# Altium PCB prop_MMX.PCBDOC
Units mm, origin at the board's own origin, x right, y up, seen from the top; angles counter-clockwise.
Board outline 153.2 x 80.2 mm, 2 copper layers (Top Layer, Bottom Layer); 69 components, 78 nets, 392 pads, 251 vias.
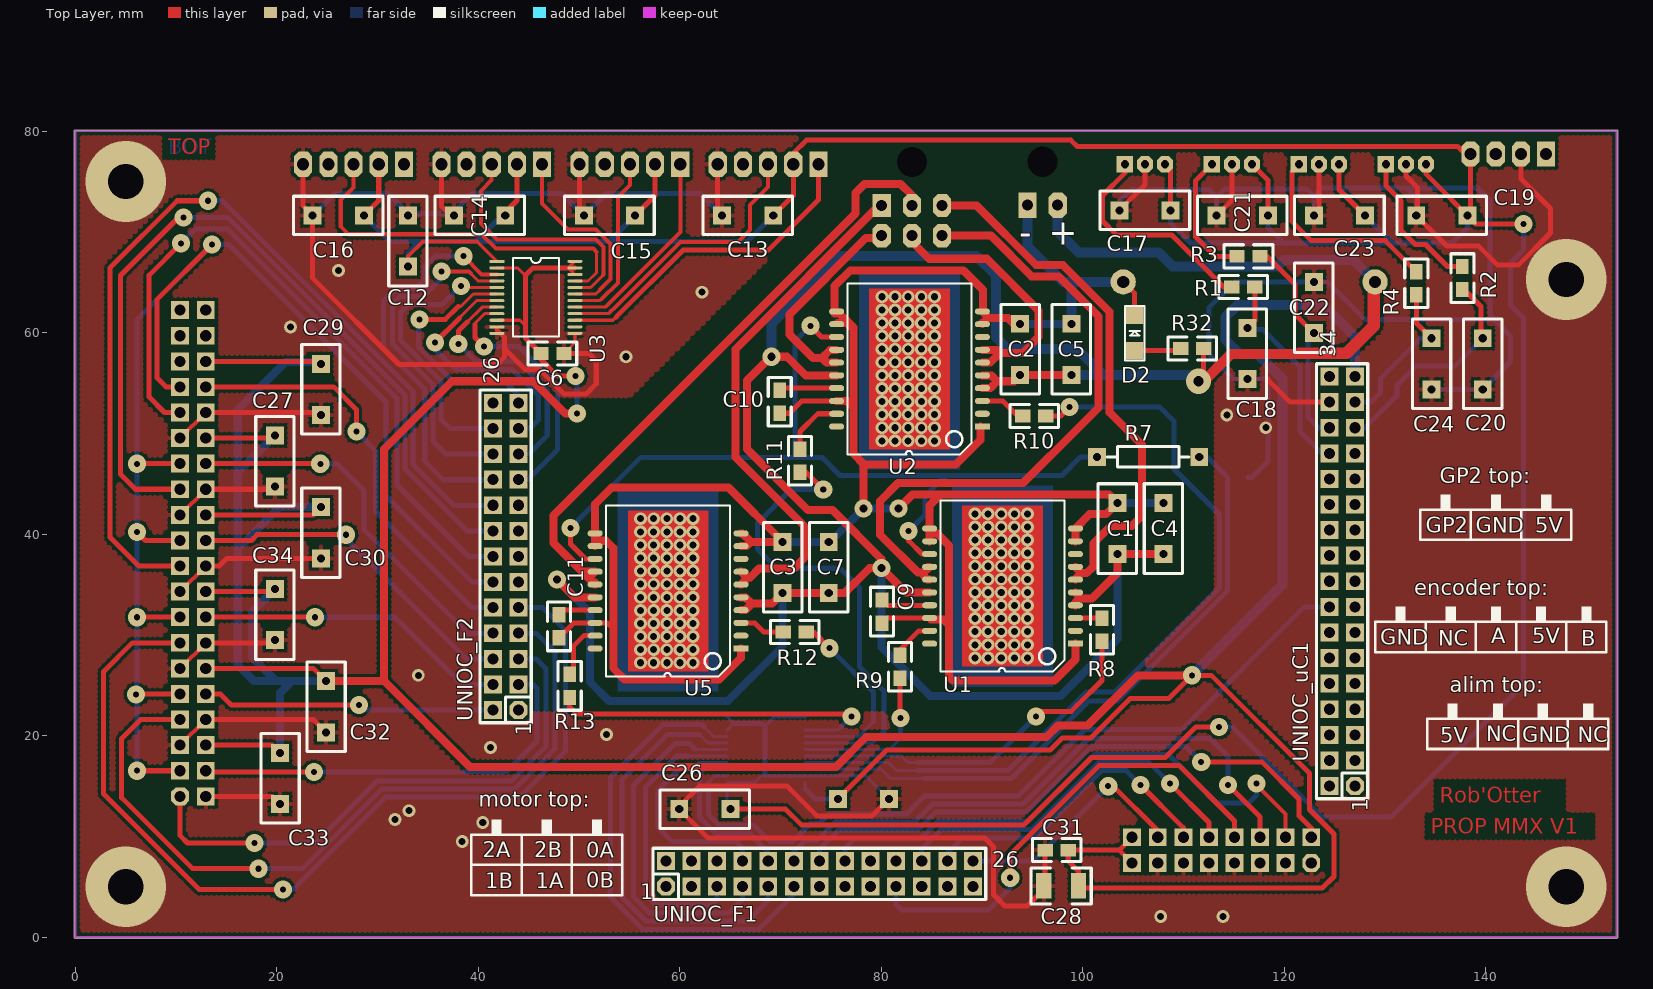
[diagram p0: Top Layer view]
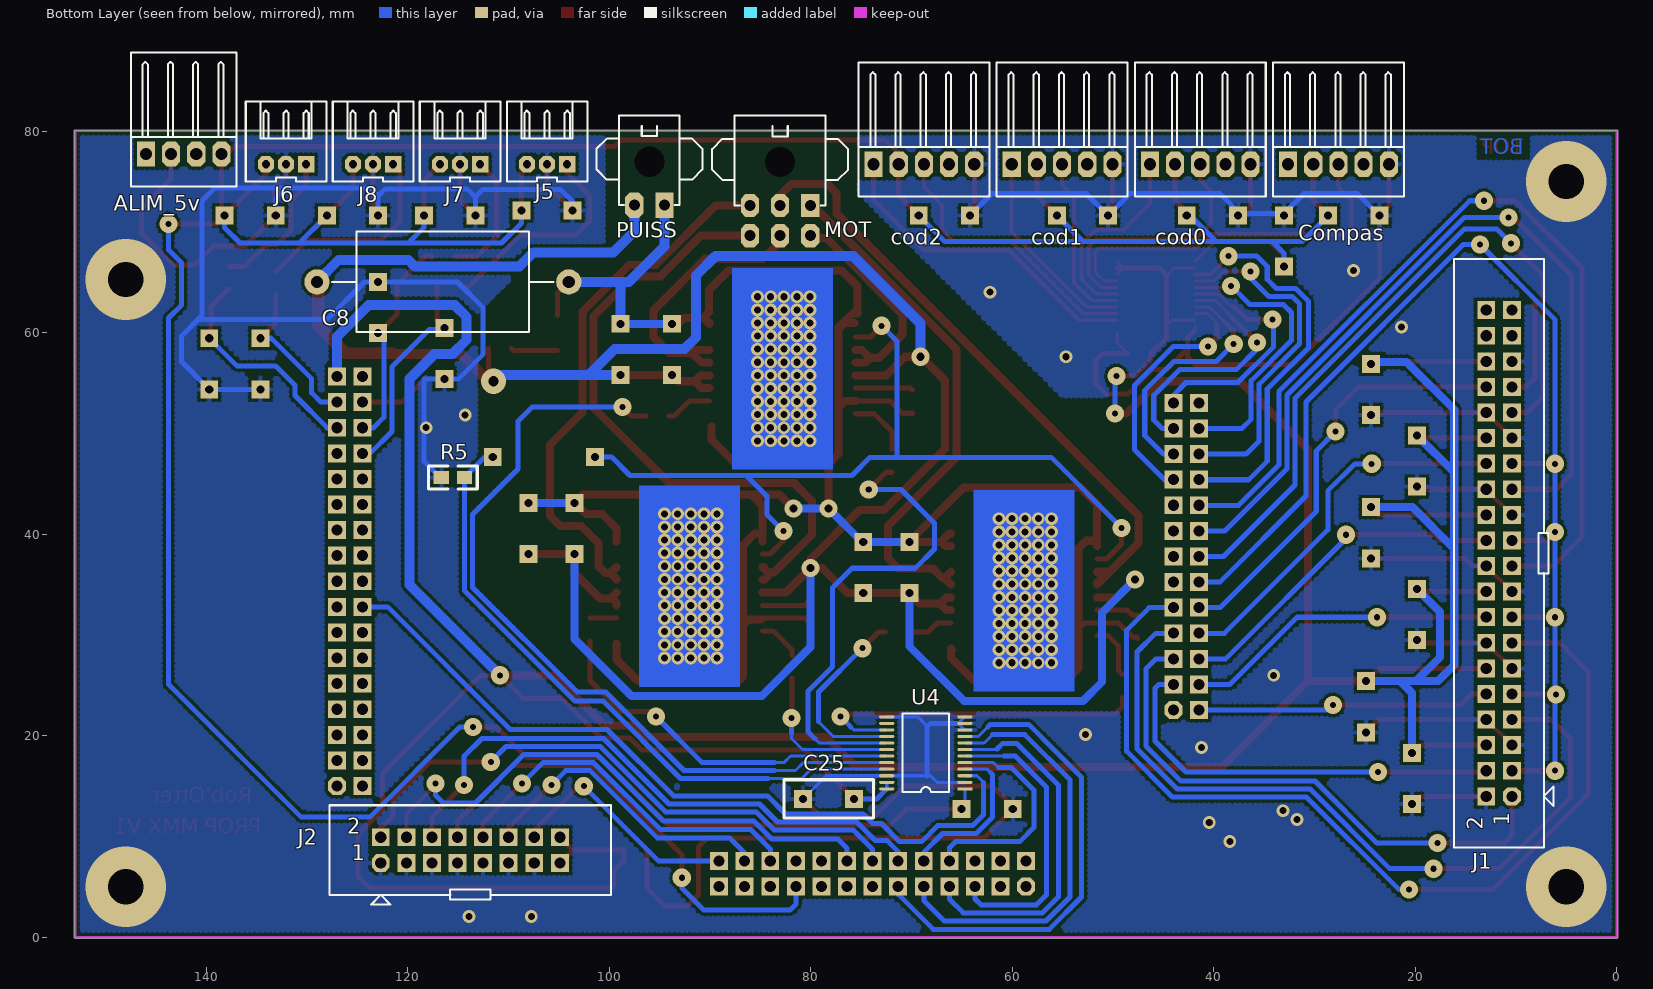
[diagram p1: Bottom Layer view, seen from below]

## Layer stack, top to bottom
Top Layer: signal copper 0.0356
Dielectric: dielectric 0.32, FR-4, Dk 4.8
Bottom Layer: signal copper 0.0356

## Board outline
0,-0.1 cw(c0,0) -0.1,0 -0.1,80 cw(c0,80) 0,80.1 153,80.1 cw(c153,80) 153.1,80 153.1,0 cw(c153,0) 153,-0.1

## Design rules (kind name [scope] priority, off if disabled: settings)
Clearance [All] p1 off: gap=0.4
Clearance plan_de_masse [(IsPolygon)] p2 off: gap=0.8
Clearance max3002 [All] p3: gap=0.3
ComponentClearance [All] p1: gap=0.254 collisioncheckmode=1
HoleSize [All] p1: absolutevalues=TRUE maxlimit=4 minlimit=0.025 maxpercent=80.000 minpercent=20.000
PlaneClearance [All] p1: clearance=0.8
PlaneConnect [All] p1: planeconnectstyle=Direct reliefexpansion=0.508 reliefentries=4 reliefconductorwidth=0.4 reliefairgap=0.254
PolygonConnect [All] p1: connectstyle=Relief reliefconductorwidth=0.4 reliefentries=4 polygonreliefangle="90 Angle"
RoutingLayers [All] p1: top layer=Horizontal bottom layer=Vertical
RoutingVias [All] p1: holewidth=0.6 width=1.8 viastyle="Through Hole" minholewidth=0.6 minwidth=1.6 maxholewidth=0.6 maxwidth=4
SolderMaskExpansion [All] p1: expansion=0.102
TestPointUsage [All] p1: valid=0 allowmultiple=FALSE
Testpoint [All] p1: side=15 testpointundercomponent=TRUE minsize=1.016 maxsize=2.54 preferedsize=1.524 minholesize=0 maxholesize=1.016 preferedholesize=0.813 testpointgrid=0.025 style=1023 order=1234567890
Width [All] p1: maxlimit=2 minlimit=0.3 preferedwidth=0.5 bottomlayer_prefwidth=1 minimp=50.000000 maximp=50.000000 favimp=50.000000
13 further rules are at their usual default settings.

## Classes and differential pairs
component class U_ground_detector: C27 C29 C30 C32 C33 C34 J1
component class U_pontH: C1 C2 C3 C4 C5 C7 C8 C9 C10 C11 C25 C26 D2 fan MOT PUISS R5 R7 R8 R9 R10 R11 R12 R13 R32 U1 U2 U4 U5
component class compas_heds_mouse: ALIM_5v C6 C12 C13 C14 C15 C16 C17 C18 C19 C20 C21 C22 C23 C24 C28 C31 cod0 cod1 cod2 Compas J2 J5 J6 J7 J8 R1 R2 R3 R4 U3 UNIOC_F1 UNIOC_F2 UNIOC_uC1

## Components (designator, comment, footprint, x,y, rotation, side; value= is the part's Value field where it differs from the comment)
ALIM_5v "minikk_4v_hor" CON_MINI_KK_4H 142.24,77.724 r180 bottom
C1 "100nF" TCONDO 103.441,38.016 r90 top
C2 "100nF" TCONDO 93.789,55.796 r90 top
C3 "100nF" TCONDO 74.79,34.156 r90 top
C4 "1µF" TCONDO 108.013,38.016 r90 top
C5 "1µF" TCONDO 98.869,55.796 r90 top
C6 "100nF" 0805 46.228,57.912 r0 top
C7 "1µF" TCONDO 70.218,34.156 r90 top
C8 "1500µF" CAPA_AXIAL_10_21 129.032,65.024 r180 bottom
C9 "33nF" 0805 80.073,33.444 r270 top
C10 "33nF" 0805 69.913,54.272 r270 top
C11 "33nF" 0805 48.004,31.971 r270 top
C12 "100nF" TCONDO 33.02,66.548 r90 top
C13 "100nF" TCONDO 69.276,71.628 r180 top
C14 "100nF" TCONDO 42.672,71.628 r180 top
C15 "100nF" TCONDO 55.56,71.628 r180 top
C16 "100nF" TCONDO 28.636,71.628 r180 top
C17 "100nF" TCONDO 108.712,72.136 r180 top
C18 "100nF" TCONDO 116.332,60.452 r270 top
C19 "100nF" TCONDO 138.176,71.628 r180 top
C20 "100nF" TCONDO 139.7,59.436 r270 top
C21 "100nF" TCONDO 118.364,71.628 r180 top
C22 "100nF" TCONDO 122.936,59.944 r90 top
C23 "100nF" TCONDO 128.016,71.628 r180 top
C24 "100nF" TCONDO 134.62,59.436 r270 top
C25 "100nF" TCONDO 75.692,13.716 r0 bottom
C26 "100nF" TCONDO 65.024,12.7 r180 top
C27 "100nF" TCONDO 19.812,49.784 r270 top
C28 "2,2µF" 1210 99.568,5.08 r180 top
C29 "100nF" TCONDO 24.384,56.896 r270 top
C30 "100nF" TCONDO 24.384,42.672 r270 top
C31 "100nF" 0805 98.552,8.636 r180 top
C32 "100nF" TCONDO 24.892,25.4 r270 top
C33 "100nF" TCONDO 20.32,18.288 r270 top
C34 "100nF" TCONDO 19.812,34.544 r270 top
cod0 "minikk_5v_hor" CON_MINI_KK_5H 41.336,76.708 r180 bottom
cod1 "minikk_5v_hor" CON_MINI_KK_5H 55.052,76.708 r180 bottom
cod2 "minikk_5v_hor" CON_MINI_KK_5H 68.768,76.708 r180 bottom
Compas "minikk_5v_hor" CON_MINI_KK_5H 27.62,76.708 r180 bottom
D2 "POWER" LED_CMS 105.156,59.944 r270 top
J1 "40PIN" HE10-40V 11.684,38.1 r90 bottom
J2 "16PIN" HE10-16V 113.792,8.636 r180 bottom
J5 "JST_3V_GP2D" CON_GP2_V 106.172,76.708 r180 bottom
J6 "JST_3V_GP2D" CON_GP2_V 132.08,76.708 r180 bottom
J7 "JST_3V_GP2D" CON_GP2_V 114.808,76.708 r180 bottom
J8 "JST_3V_GP2D" CON_GP2_V 123.444,76.708 r180 bottom
MOT "6PIN" CON_MAT_N_LOK_2*3H 83.044,71.12 r0 bottom
PUISS "mnlok_2h" CON_MAT_N_LOK_2H 96.012,72.644 r0 bottom
R1 "10k" 0805 114.808,64.516 r0 top
R2 "10k" 0805 137.668,66.548 r270 top
R3 "10k" 0805 115.316,67.564 r0 top
R4 "10k" 0805 133.096,66.04 r270 top
R5 "10k" 0805 114.379,45.636 r0 bottom
R7 "470" TRES 101.409,47.668 r0 top
R8 "470" 0805 101.917,29.38 r90 top
R9 "470" 0805 81.877,25.697 r90 top
R10 "470" 0805 96.329,51.732 r180 top
R11 "470" 0805 71.945,46.144 r90 top
R12 "470" 0805 72.555,30.295 r180 top
R13 "470" 0805 49.085,23.792 r90 top
R32 "1k" 0805 109.728,58.42 r0 top
U1 "MC33886" HSOP20 92.037,34.841 r180 top
U2 "MC33886" HSOP20 82.804,56.388 r180 top
U3 "74lvc4245a" SSOP24 45.72,63.5 r0 top
U4 "74lvc4245a" SSOP24 68.58,18.288 r0 bottom
U5 "MC33886" HSOP20 58.839,34.359 r180 top
UNIOC_F1 "UNIOC_NG_FPGA2" TCON26 58.62,5 r0 top locked
UNIOC_F2 "UNIOC_NG_FPGA1" TCON26 44,22.54 r90 top
UNIOC_uC1 "UNIOC_NG_µC" TCON34 127,15 r90 top locked

## Footprints (in the part's own frame and the unit in brackets; to place one, negate y for a bottom-side part, rotate by r counter-clockwise, add the part's x,y. Pads: shape width x height; smd on the part's side, far side on the other; paste and mask are expansions set on the pad)
0805 [mil]
  rect 60x50 smd: 1(-0.32,0.36) 2(89.68,0.36)
  silkscreen extent -50,-45 140,45
1210 [mil]
  rect 60x100 smd: 1(-0.2,0.1) 2(134.8,0.1)
  silkscreen extent -50,-70 185,70
CAPA_AXIAL_10_21 [mm]
  round 2.5 hole 1.2: 1(0.015,0.012) 2(25.015,0.012)
  silkscreen extent 1.52,-4.99 23.52,5.01
CON_GP2_V [mm]
  rect 1.6x1.6 hole 0.8: 1(2,0)
  oct 1.6x1.6 hole 0.8: 2(0,0) 3(-2,0)
  silkscreen extent -4,-1.7 4,6.25
CON_MAT_N_LOK_2*3H [mm]
  rect 1.8x2.3 hole 1.1: 1(-3,-1.5)
  oct 1.8x2.3 hole 1.1: 2(-3,1.5) 3(0,-1.5) 4(0,1.5) 5(3,-1.5) 6(3,1.5)
  round 1.524 hole 3: ""(0,-5.82)
  silkscreen extent -6.75,-10.42 6.75,-1.5
CON_MAT_N_LOK_2H [mm]
  rect 1.8x2.5 hole 1.1: 1(-1.5,0)
  oct 1.8x2.5 hole 1.1: 2(1.5,0)
  round 1.524 hole 3: 3(0,-4.32)
  silkscreen extent -5.25,-8.92 5.25,0
CON_MINI_KK_4H [mm]
  rect 1.8x2.5 hole 1.2: 1(-3.75,0)
  oct 1.8x2.5 hole 1.2: 2(-1.25,0) 3(1.25,0) 4(3.75,0)
  silkscreen extent -5.25,-3.2 5.25,10.1
CON_MINI_KK_5H [mm]
  rect 1.8x2.5 hole 1.2: 1(-5,0)
  oct 1.8x2.5 hole 1.2: 2(-2.5,0) 3(0,0) 4(2.5,0) 5(5,0)
  silkscreen extent -6.5,-3.2 6.5,10.1
HE10-16V [mil]
  oct 70x70 hole 43.31: 1(-350,-50)
  rect 70x70 hole 43.31: 2(-350,50) 3(-250,-50) 4(-250,50) 5(-150,-50) 6(-150,50) 7(-50,-50) 8(-50,50) 9(50,-50) 10(50,50) 11(150,-50) 12(150,50) 13(250,-50) 14(250,50) 15(350,-50) 16(350,50)
  silkscreen extent -550,-213 550,175
HE10-40V [mil]
  oct 70x70 hole 43.31: 1(-950,-50)
  rect 70x70 hole 43.31: 2(-950,50) 3(-850,-50) 4(-850,50) 5(-750,-50) 6(-750,50) 7(-650,-50) 8(-650,50) 9(-550,-50) 10(-550,50) 11(-450,-50) 12(-450,50) 13(-350,-50) 14(-350,50) 15(-250,-50) 16(-250,50) 17(-150,-50) 18(-150,50) 19(-50,-50) 20(-50,50) 21(50,-50) 22(50,50) 23(150,-50) 24(150,50) 25(250,-50) 26(250,50) 27(350,-50) 28(350,50) 29(450,-50) 30(450,50) 31(550,-50) 32(550,50) 33(650,-50) 34(650,50) 35(750,-50) 36(750,50) 37(850,-50) 38(850,50) 39(950,-50) 40(950,50)
  silkscreen extent -1150,-213 1150,175
HSOP20 [mm]
  rect 1.5x0.6 smd: 1(-7.235,5.715)
  oval 1.5x0.6 smd: 2(-7.235,4.445) 3(-7.235,3.175) 4(-7.235,1.905) 5(-7.235,0.635) 6(-7.235,-0.635) 7(-7.235,-1.905) 8(-7.235,-3.175) 9(-7.235,-4.445) 10(-7.235,-5.715) 11(7.235,-5.715) 12(7.235,-4.445) 13(7.235,-3.175) 14(7.235,-1.905) 15(7.235,-0.635) 16(7.235,0.635) 17(7.235,1.905) 18(7.235,3.175) 19(7.235,4.445) 20(7.235,5.715)
  Top Layer region: -3.999,-8 4.001,-8 4.001,8 -3.999,8
  Bottom Layer region: -5,-10 5,-10 5,10 -5,10
  silkscreen extent -6.14,-8.5 6.14,8.5
LED_CMS [mm]
  rect 1.7x1.7 smd: 1(1.744,0.003) 2(-1.756,0.003)
  silkscreen extent -2.71,-0.95 2.69,0.95
SSOP24 [mm]
  rect 1.5x0.3 smd: 1(-3.875,3.575)
  oval 1.5x0.3 smd: 2(-3.875,2.925) 3(-3.875,2.275) 4(-3.875,1.625) 5(-3.875,0.975) 6(-3.875,0.325) 7(-3.875,-0.325) 8(-3.875,-0.975) 9(-3.875,-1.625) 10(-3.875,-2.275) 11(-3.875,-2.925) 12(-3.875,-3.575) 13(3.875,-3.575) 14(3.875,-2.925) 15(3.875,-2.275) 16(3.875,-1.625) 17(3.875,-0.975) 18(3.875,-0.325) 19(3.875,0.325) 20(3.875,0.975) 21(3.875,1.625) 22(3.875,2.275) 23(3.875,2.925) 24(3.875,3.575)
  silkscreen extent -2.29,-3.9 2.29,3.9
TCON26 [mil]
  oct 70x70 hole 43.31: 1(0.05,0.35)
  rect 70x70 hole 43.31: 2(0.05,100.35) 3(100.05,0.35) 4(100.05,100.35) 5(200.05,0.35) 6(200.05,100.35) 7(300.05,0.35) 8(300.05,100.35) 9(400.05,0.35) 10(400.05,100.35) 11(500.05,0.35) 12(500.05,100.35) 13(600.05,0.35) 14(600.05,100.35) 15(700.05,0.35) 16(700.05,100.35) 17(800.05,0.35) 18(800.05,100.35) 19(900.05,0.35) 20(900.05,100.35) 21(1000.05,0.35) 22(1000.05,100.35) 23(1100.05,0.35) 24(1100.05,100.35) 25(1200.05,0.35) 26(1200.05,100.35)
  silkscreen extent -50,-50 1250,150
TCON34 [mil]
  oct 70x70 hole 43.31: 1(-0.11,-0.8)
  rect 70x70 hole 43.31: 2(-0.11,99.2) 3(99.89,-0.8) 4(99.89,99.2) 5(199.89,-0.8) 6(199.89,99.2) 7(299.89,-0.8) 8(299.89,99.2) 9(399.89,-0.8) 10(399.89,99.2) 11(499.89,-0.8) 12(499.89,99.2) 13(599.89,-0.8) 14(599.89,99.2) 15(699.89,-0.8) 16(699.89,99.2) 17(799.89,-0.8) 18(799.89,99.2) 19(899.89,-0.8) 20(899.89,99.2) 21(999.89,-0.8) 22(999.89,99.2) 23(1099.89,-0.8) 24(1099.89,99.2) 25(1199.89,-0.8) 26(1199.89,99.2) 27(1299.89,-0.8) 28(1299.89,99.2) 29(1399.89,-0.8) 30(1399.89,99.2) 31(1499.89,-0.8) 32(1499.89,99.2) 33(1599.89,-0.8) 34(1599.89,99.2)
  silkscreen extent -50,-51 1650,149
TCONDO [mil]
  rect 70x70 hole 31.5: 1(-0.12,0.1) 2(199.88,0.1)
  silkscreen extent -75,-75 275,75
TRES [mil]
  rect 70x70 hole 31.5: 1(-0.19,-0.07) 2(399.81,-0.07)
  silkscreen extent 40,-40 360,40

## Part data
ALIM_5v: library part con_mini_kk_4h, "connecteur mini kk 4voies horizontal"
C1 C2 C3 C9 C10 C11 C27 C29 C30 C31 C32 C33 C34: library part TCONDO
C4 C5 C6 C7 C12 C13 C14 C15 C16 C17 C18 C19 C20 C21 C22 C23 C24 C25 C26: library part CONDO
C8 C28: library part "CAPACITOR POL"
cod0 cod1 cod2 Compas: library part con_mini_kk_5h, "connecteur mini kk 5 voies horizontal"
D2: library part LED_
J5 J6 J7 J8: library part con_gp2, "ref FN : 949-2429 connecteur JST utilisé dans les GP2D*"
PUISS: library part con_mat_n_lok_2h, "connecteur mat'n-lok 2 voies horizontal"
R1 R2 R3 R4 R32: library part RES
R5 R7 R8 R9 R10 R11 R12 R13: library part TRESIST
U1 U2 U5: "pont H 5A"
U3 U4: library part 74ALVC4245, "octal voltage transceiver"

## Via types
v1: diameter 1.27, hole 0.7, Top Layer to Bottom Layer, 195 vias
v2: diameter 1.8, hole 0.6, Top Layer to Bottom Layer, 46 vias
v3: diameter 1.8, hole 0.8, Top Layer to Bottom Layer, 5 vias
v4: diameter 8, hole 3.5, Top Layer to Bottom Layer, 4 vias
v5: diameter 2.5, hole 1, Top Layer to Bottom Layer, 1 vias

## Nets (pads, with @x,y where several pads share a name; then routed paths per layer and width w, separated by ;. In a path a pad name is that pad's centre, name@x,y a point inside that pad or via, vN(x,y) a via of type N, cw(c..) or ccw(c..) an arc to the next point about the centre after c; other vN are vias at no path point)
3V3: C6.1 C25.1 C27.1 C28.1 C29.1 C30.1 C31.1 C32.1 C33.1 C34.1 J1.6 J1.12 J1.18 J1.24 J1.30 J1.36 J2.15 J2.16 U3.2 U3.10 U3.22 U3.23 U3.24 U4.23 U4.24 UNIOC_uC1.33 | length 477.6
  Top Layer w0.3: U3.10 44.143,61.225 44.696,60.672 ; U3.2 41.852,66.432 43.904,66.432 44.672,65.664 ; U3.22 49.27,66.1 48.945,66.425 U3.24 ; C31.1@98.557,8.63 C31.1 C31.1@98.637,8.704
  Top Layer w0.5: J1.6 19.564,19.05 C33.1 ; J1.12 23.628,26.67 C32.1 ; J1.18 19.557,34.29 C34.1 ; J1.24 23.621,41.91 C30.1 ; J1.36 24.136,57.15 C29.1 ; J1.30@13.088,49.664 J1.30 19.557,49.53 C27.1 ; U3.23 48.945,66.425 45.433,66.425 44.696,65.688 44.696,59.445 C6.1 46.22,57.332 47.872,55.68 v2(49.664,55.68) ; C25.1 80.535,18.56 96.768,18.56 97.975,19.767 100.791,19.767 104.704,23.68 108.544,23.68 v2(110.848,25.984) 112.768,25.984 122.496,16.256 122.496,12.672 124.928,10.24 124.928,6.016 123.776,4.864 99.787,4.864 C28.1 99.573,6.539 98.56,7.552 C31.1 103.623,8.627 ; J2.16 103.623,8.627 ; J2.15@104.96,7.168 104.96,7.29 104.893,7.357 103.623,8.627
  Top Layer w0.8: C32.1 30.661,25.403 ; v2(49.792,51.968) 48.64,51.968 45.44,55.168 37.376,55.168 30.661,48.453 30.661,25.403 ; v2(110.848,25.984) 105.472,25.984 100.476,20.988 97.532,20.988 96.384,19.84 78.464,19.84 75.52,16.896 39.168,16.896 30.661,25.403
  Bottom Layer w0.3: U4.24 U4.23 ; C25.1@75.578,13.824 C25.1
  Bottom Layer w0.5: v2(49.664,55.68) 49.792,55.552 v2(49.792,51.968) ; U4.24 73.455,13.713 C25.1
  Bottom Layer w0.8: 16.128,38.528 20.275,42.675 C30.1 ; 16.128,46.101 C27.1 ; C34.1@19.584,34.317 17.536,32.269 17.536,27.776 19.909,25.403 ; C33.1 20.323,24.222 21.504,25.403 ; C29.1 24.198,57.088 20.864,57.088 16.128,52.352 16.128,27.008 17.733,25.403 C32.1
  Bottom Layer w1: v2(110.848,25.984) 119.808,34.944 119.808,55.424 117.376,57.856 115.584,57.856 114.176,59.264 114.176,61.568 115.328,62.72 123.904,62.72 127.009,59.615 UNIOC_uC1.33@127.009,55.636
5V: ALIM_5v.4 C12.1 C13.1 C14.1 C15.1 C16.1 C17.1 C19.1 C21.1 C23.1 C26.1 cod0.2 cod1.2 cod2.2 Compas.2 J5.3 J6.3 J7.3 J8.3 U3.1 U4.1 | length 374.9
  Top Layer w0.3: 39.86,69.06 U3.1
  Top Layer w0.4: C12.1 33.017,67.577 34.5,69.06 39.86,69.06
  Top Layer w0.5: C16.1 30.12,73.106 Compas.2 ; C14.1@42.355,71.625 43.836,73.106 cod0.2 ; C15.1@55.515,71.577 57.552,73.614 cod1.2 ; C26.1 70.503,12.697 72.064,11.136 94.176,11.136 100.864,17.824 108.192,17.824 111.232,20.864 v2(113.536,20.864) ; C13.1 71.268,73.614 71.268,77.796 72.576,79.104 98.816,79.104 99.456,78.464 137.216,78.464 137.956,77.724 ALIM_5v.4 138.49,71.936 C19.1 ; J5.3 108.407,76.708 108.715,76.4 C17.1 ; J7.3 118.367,75.149 C21.1 ; J8.3 125.444,74.201 C23.1 ; J6.3 134.08,75.725 139.021,70.784 v2(143.744,70.784)
  Bottom Layer w0.3: U4.1 64.705,13.02 C26.1
  Bottom Layer w0.5: C16.1 31.227,69.037 66.691,69.037 C13.1 ; C12.1 33.017,67.879 34.176,69.037 ; 39.863,69.037 39.863,69.133 C14.1@42.355,71.625 ; 52.975,69.037 C15.1 ; C17.1 108.715,70.863 110.693,68.885 136.652,68.885 138.179,70.412 C19.1 ; v2(113.536,20.864) 114.816,20.864 123.776,11.904 130.56,11.904 143.744,25.088 143.744,61.44 142.464,62.72 142.464,66.944 143.744,68.224 v2(143.744,70.784) ; C21.1 118.367,70.456 119.939,68.885 ; C23.1 130.76,68.885
+BATT: C1.1 C2.1 C3.1 C4.1 C5.1 C7.1 C8.1 PUISS.2 R32.2 U1.4 U1.5 U1.16 U2.4 U2.5 U2.16 U5.4 U5.5 U5.16 | length 309.2
  Top Layer w0.5: 50.637,33.721 U5.16@51.596,33.721 ; v5(111.488,55.168) 112.006,55.686 R32.2
  Top Layer w0.8: v3(47.815,35.476) 49.57,33.721 U5.16@51.596,33.721 ; U5.4@66.066,32.451 66.533,32.451 67.119,33.038 ; U5.5@66.066,33.721 66.537,33.721 67.17,33.089 69.152,33.089 C7.1 ; v3(69.12,57.6) 70.656,57.6 72.503,55.753 U2.16 ; v3@69.12,57.625 69.05,57.625 66.662,55.238 66.662,48.43 72.707,42.385 75.146,42.385 80.022,37.508 v3(80.022,36.645) ; C7.1@70.116,34.251 C7.1 ; U1.16@84.794,34.204 82.463,34.204 v3(80.022,36.645) ; U2.4 90.835,54.483 91.52,55.168 ; U2.5 90.935,55.753 91.52,55.168 ; C5.1 C2.1 93.162,55.168 91.52,55.168 ; U1.4@99.264,32.934 99.264,33.23 99.631,33.597 ; U1.5@99.264,34.204 99.631,33.837 99.631,33.597 ; C4.1 C1.1 103.439,36.134 100.901,33.597 99.631,33.597 ; 121.472,58.112 126.208,58.112 ; C7.1 76.362,34.152 78.854,36.645 v3(80.022,36.645)
  Top Layer w1: v5(111.488,55.168) 112,55.168 114.688,57.856 126.208,57.856 129.028,60.676 129.028,65.036 128.768,64.776 128.768,60.672 126.208,58.112
  Bottom Layer w0.8: v3(47.815,35.476) 51.072,32.22 51.072,25.344 52.992,23.424 64.768,23.424 70.216,28.872 C7.1 ; v3(80.022,36.645) 80.022,28.778 84.864,23.936 97.794,23.936 103.439,29.581 C1.1
  Bottom Layer w1: v3(69.12,57.6) 69.12,60.928 75.776,67.584 89.472,67.584 91.392,65.664 91.392,59.52 92.544,58.368 99.456,58.368 102.031,55.793 ; PUISS.2 97.512,70.04 99.584,67.968 107.52,67.968 108.928,66.56 119.296,66.56 119.936,67.2 126.864,67.2 C8.1@129.028,65.036 ; C5.1 110.863,55.793 v5(111.488,55.168)
BRAKE_3V3: U4.3 UNIOC_uC1.16 | length 77.7
  Bottom Layer w0.3: 62.848,15.36 63.501,16.013 U4.3
  Bottom Layer w0.5: 62.848,15.36 62.848,12.139 63.915,11.072 67.392,11.072 68.992,9.472 71.189,9.472 72.981,11.264 73.856,11.264 74.816,12.224 82.496,12.224 84.288,14.016 93.632,14.016 100.224,20.608 109.824,20.608 121.992,32.776 UNIOC_uC1.16@124.469,32.776
BRAKE_5V: R5.1 R7.2 U4.21 | length 66.7
  Bottom Layer w0.3: U4.21 79.977,16.663 80.896,15.744 84.224,15.744
  Bottom Layer w0.5: 84.224,15.744 92.928,15.744 100.608,23.424 103.424,23.424 114.371,34.371 R5.1 R7.2@112.332,47.667 ; R7.2@111.366,47.821 R7.2@112.178,47.821 ; R7.2 R7.2@112.332,47.667 ; 113.017,46.982 R7.2@112.332,47.667
COD0_A_3V3: U3.4 UNIOC_F2.22 | length 34.2
  Top Layer w0.3: 39.276,65.846 39.997,65.125 U3.4
  Top Layer w0.4: v2(36.352,66.048) 39.074,66.048 39.276,65.846
  Bottom Layer w0.5: v2(36.352,66.048) 36.352,65.408 34.528,63.584 32.203,63.584 31.488,62.869 31.488,58.88 35.488,54.88 35.488,49.248 36.803,47.933 UNIOC_F2.22@41.461,47.933
COD0_A_5V: cod0.3 U3.20 | length 26.2
  Top Layer w0.3: U3.20 51.163,64.475 52.448,65.76 52.448,66.3
  Top Layer w0.4: cod0.3 41.336,75.133 40.269,74.066 40.269,70.815 41.844,69.24 51.69,69.24 52.448,68.482 52.448,65.76 52.398,65.71
COD0_B_3V3: U3.5 UNIOC_F2.24 | length 28.7
  Top Layer w0.3: v2(38.272,64.64) 38.437,64.475 U3.5
  Bottom Layer w0.5: v2(38.272,64.64) 36.416,62.784 33.088,62.784 32.288,61.984 32.288,59.232 36.288,55.232 36.288,51.392 37.207,50.473 41.461,50.473 UNIOC_F2.24@41.374,50.56
COD0_B_5V: cod0.1 U3.19 | length 20
  Top Layer w0.3: U3.19 51.665,63.825 52.096,64.256
  Top Layer w0.4: cod0.1 46.336,72.79 48.89,70.236 51.684,70.236 53.148,68.772 53.148,65.308 52.096,64.256
COD1_A_3V3: U3.6 UNIOC_F2.25 | length 24.2
  Top Layer w0.3: 38.016,62.592 38.272,62.592 39.505,63.825 U3.6
  Top Layer w0.5: v2(34.176,61.312) 36.736,61.312 37.935,62.511 38.016,62.592
  Bottom Layer w0.5: v2(34.176,61.312) 34.048,61.184 34.048,58.603 37.611,55.04 42.752,55.04 44.001,53.791 UNIOC_F2.25@44.001,53.013
COD1_A_5V: cod1.3 U3.18 | length 17.3
  Top Layer w0.3: U3.18 52.096,63.175 52.252,63.331
  Top Layer w0.4: 52.252,63.331 53.848,64.927 53.848,73.457 55.052,74.661 cod1.3
COD1_B_3V3: U3.7 UNIOC_F2.23 | length 25.4
  Top Layer w0.3: 38.141,61.471 39.845,63.175 U3.7
  Top Layer w0.5: v2(35.712,59.008) 38.141,61.437 38.141,61.471
  Bottom Layer w0.5: v2(35.712,59.008) 35.712,58.368 37.76,56.32 43.392,56.32 45.952,53.76 45.952,51.328 45.097,50.473 UNIOC_F2.23@44.001,50.473
COD1_B_5V: cod1.1 U3.17 | length 20.3
  Top Layer w0.3: U3.17 52.608,62.525 52.781,62.698
  Top Layer w0.4: 52.781,62.698 60.052,69.969 cod1.1
COD2_A_3V3: U3.8 UNIOC_F2.21 | length 25.3
  Top Layer w0.3: 38.912,61.056 40.381,62.525 U3.8
  Top Layer w0.5: v2(38.016,58.88) 38.016,60.16 38.912,61.056
  Bottom Layer w0.5: v2@37.632,58.88 v2(38.016,58.88) 39.776,57.12 44,57.12 46.848,54.272 46.848,49.792 44.989,47.933 UNIOC_F2.21@44.001,47.933
COD2_A_5V: cod2.3 U3.16 | length 28.1
  Top Layer w0.3: U3.16 52.948,61.875 53.147,62.074
  Top Layer w0.4: 53.147,62.074 53.555,62.482 60.059,68.986 65.786,68.986 66.966,70.166 66.966,72.671 68.768,74.473 cod2.3
COD2_B_3V3: U3.9 UNIOC_F2.19 | length 25.6
  Top Layer w0.3: 39.68,60.8 39.68,60.928 40.627,61.875 U3.9
  Top Layer w0.5: 39.68,60.8 39.68,59.52 v2(40.576,58.624)
  Bottom Layer w0.5: v2(40.576,58.624) 44.032,58.624 47.872,54.784 47.872,48.384 44.881,45.393 UNIOC_F2.19@44.001,45.393
COD2_B_5V: cod2.1 U3.15 | length 32.7
  Top Layer w0.3: U3.15 53.359,61.225 53.702,61.568
  Top Layer w0.5: 53.702,61.568 60.32,68.186 68.781,68.186 73.768,73.174 cod2.1
COMPAS_3V3: U3.3 UNIOC_F2.20 | length 39.7
  Top Layer w0.4: v2(38.528,67.584) 40.337,65.775 U3.3
  Bottom Layer w0.5: v2(38.528,67.584) 35.712,67.584 34.688,66.56 34.688,65.28 33.792,64.384 31.872,64.384 30.592,63.104 30.592,58.496 34.688,54.4 34.688,47.232 36.527,45.393 UNIOC_F2.20@41.461,45.393
COMPAS_5V: Compas.3 U3.21 | length 37.7
  Top Layer w0.3: U3.21 50.901,65.125 51.748,65.972 51.748,68.01
  Top Layer w0.4: Compas.3 27.62,74.422 26.35,73.152 26.35,70.528 27.118,69.76 40.32,69.76 41.754,68.326 51.432,68.326 51.748,68.01
DIR0_3V3: U4.5 UNIOC_F1.8 | length 22.2
  Bottom Layer w0.3: 61.366,16.822 61.857,17.313 U4.5
  Bottom Layer w0.5: 61.366,16.822 60.086,16.822 57.856,14.592 57.856,10.88 59.264,9.472 65.639,9.472 66.233,8.878 UNIOC_F1.8@66.233,7.539
DIR0_5V: R8.1 U4.19 | length 37
  Top Layer w0.5: v2(95.36,21.888) 95.872,22.4 98.836,22.4 98.964,22.528 99.448,23.012 101.908,25.472 R8.1
  Bottom Layer w0.3: U4.19 82.005,17.963 82.624,17.344 83.584,17.344
  Bottom Layer w0.5: 83.584,17.344 90.816,17.344 v2(95.36,21.888)
DIR1_3V3: U4.4 UNIOC_F1.10 | length 16.9
  Bottom Layer w0.3: 61.952,16.128 62.089,16.265 62.487,16.663 U4.4
  Bottom Layer w0.5: 62.08,16.256 61.952,16.128 ; 62.089,16.265 61.952,16.128 ; 67.072,10.112 66.912,10.272 ; UNIOC_F1.10@68.773,7.539 68.773,8.411 66.912,10.272 ; 61.952,16.128 61.952,11.904 63.584,10.272 66.912,10.272
DIR1_5V: R10.1 U4.20 | length 81
  Top Layer w0.5: R10.1 97.803,51.723 v2(98.688,52.608)
  Bottom Layer w0.3: U4.20 80.735,17.313 81.504,16.544 83.584,16.544
  Bottom Layer w0.5: 83.584,16.544 92.576,16.544 100.352,24.32 103.189,24.32 113.571,34.703 113.571,41.949 109.056,46.464 109.056,51.2 107.648,52.608 v2(98.688,52.608)
DIR2_3V3: U4.8 UNIOC_F1.9 | length 42
  Bottom Layer w0.3: 61.952,20.096 62.785,19.263 U4.8
  Bottom Layer w0.5: 61.952,20.096 58.752,20.096 54.272,15.616 54.272,3.968 56.64,1.6 66.752,1.6 68.773,3.621 UNIOC_F1.9@68.773,4.999
DIR2_5V: R12.1 U4.16 | length 19.5
  Top Layer w0.5: R12.1 73.266,30.286 v2(74.88,28.672)
  Bottom Layer w0.3: U4.16 77.769,19.913 79.232,21.376
  Bottom Layer w0.5: v2(74.88,28.672) 79.232,24.32 79.232,21.376
ENABLE_SENSOR_0: J1.4 UNIOC_F2.3 | length 41.4
  Top Layer w0.5: J1.4 13.08,16.384 v2(23.68,16.384)
  Bottom Layer w0.5: v2(23.68,16.384) 42.752,16.384 45.824,19.456 45.824,24.704 45.455,25.073 UNIOC_F2.3@44.001,25.073
ENABLE_SENSOR_1: J1.10 UNIOC_F2.2 | length 29.2
  Top Layer w0.5: J1.10 14.398,24.13 15.488,23.04 v2(28.16,23.04)
  Bottom Layer w0.5: v2(28.16,23.04) 28.667,22.533 UNIOC_F2.2@41.461,22.533
ENABLE_SENSOR_2: J1.16 UNIOC_F2.4 | length 31.3
  Top Layer w0.5: J1.16 23.802,31.75 v2(23.808,31.744)
  Bottom Layer w0.5: v2(23.808,31.744) 31.744,31.744 38.415,25.073 UNIOC_F2.4@41.461,25.073
ENABLE_SENSOR_3: J1.22 UNIOC_F2.6 | length 34.1
  Top Layer w0.5: J1.22 17.482,39.37 18.048,39.936 v2(26.88,39.936)
  Bottom Layer w0.5: v2(26.88,39.936) 26.88,39.552 38.819,27.613 UNIOC_F2.6@41.461,27.613
ENABLE_SENSOR_4: J1.28 UNIOC_F2.8 | length 37.7
  Top Layer w0.5: J1.28 24.306,46.99 v2(24.32,46.976)
  Bottom Layer w0.5: v2(24.32,46.976) 25.984,46.976 28.672,44.288 28.672,40.427 38.947,30.153 UNIOC_F2.8@41.461,30.153
ENABLE_SENSOR_5: J1.34 UNIOC_F2.10 | length 42.6
  Top Layer w0.5: J1.34 25.646,54.61 27.904,52.352 v2(27.904,50.176)
  Bottom Layer w0.5: v2(27.904,50.176) 29.824,48.256 29.824,42.24 39.371,32.693 41.525,32.693 UNIOC_F2.10@41.6,32.768
GND: ALIM_5v.2 C6.2 C12.2 C13.2 C14.2 C15.2 C16.2 C17.2 C18.2 C19.2 C20.2 C21.2 C22.2 C23.2 C24.2 C25.2 C26.2 C27.2 C28.2 C29.2 C30.2 C31.2 C32.2 C33.2 C34.2 cod0.5 cod1.5 cod2.5 Compas.5 J1.2 J1.5 J1.8 J1.11 J1.14 J1.17 J1.20 J1.23 J1.26 J1.29 J1.32 J1.35 J2.1 J2.3 J2.5 J2.7 J2.9 J2.11 J2.13 J5.2 J6.2 J7.2 J8.2 R5.2 U3.11 U3.12 U3.13 U4.2 U4.10 U4.11 U4.12 U4.13 U4.22 UNIOC_uC1.32 | length 478.1
  Top Layer w0.3: 41.845,60.288 U3.11 ; C6.2 49.595,59.01 U3.13
  Top Layer w0.4: J1.5 J1.8 ; J1.11 J1.14 ; J1.17 J1.20 ; J1.23 J1.26 ; J1.29 J1.32
  Top Layer w0.5: J1.2 19.564,13.97 C33.2 ; J1.8 23.628,21.59 C32.2 ; J1.14 19.557,29.21 C34.2 ; J1.20 14.302,36.83 15.067,37.595 C30.2 ; J1.26 19.557,44.45 C27.2 ; J1.32 24.136,52.07 C29.2 ; Compas.5 22.62,72.565 C16.2 23.559,65.401 32.128,56.832 41.856,56.832 42.624,57.6 42.624,59.509 41.845,60.288 ; cod0.5 36.336,72.565 C14.2@37.275,71.625 ; 42.624,58.368 44.672,56.32 46.101,56.32 48.533,53.888 50.688,53.888 51.712,54.912 51.712,57.216 51.007,57.921 C6.2 ; cod1.5 50.052,72.057 C15.2 ; cod2.5 63.768,72.057 C13.2 ; C25.2 79.087,12.032 73.6,12.032 70.656,14.976 61.952,14.976 59.947,12.971 C26.2 62.789,9.856 90.24,9.856 91.136,8.96 91.136,4.224 92.288,3.072 94.464,3.072 96.274,4.882 C31.2 ; C17.2 106.172,74.67 J5.2 ; C21.2 114.808,73.146 J7.2 ; 118.367,55.375 118.367,55.329 120.6,53.096 UNIOC_uC1.32@124.469,53.096 ; C23.2 123.444,72.13 J8.2 ; J6.2 132.08,75.536 133.248,74.368 133.248,71.477 136.145,68.58 139.292,68.58 141.184,66.688 143.232,66.688 146.432,69.888 146.432,72.32 143.49,75.262 ALIM_5v.2
  Bottom Layer w0.3: U4.2 67.459,15.363 68.109,16.013 78.469,16.013 C25.2 ; U4.10 65.355,21.213 U4.12 ; 68.48,20.829 68.48,20.967 69.376,21.863 U4.13
  Bottom Layer w0.5: C16.2 25.746,73.812 31.02,73.812 33.017,71.815 37.406,71.815 39.404,73.812 48.296,73.812 C15.2 52.67,73.812 62.012,73.812 C13.2 ; U4.11@65.355,21.213 68.096,21.213 68.48,20.829 68.48,16.013 ; C17.2@103.635,73.003 104.851,74.219 112.522,74.219 113.287,73.454 ; C21.2 113.287,73.454 ; R5.2@116.421,45.627 116.795,45.627 118.367,47.199 118.367,55.375 114.993,55.375 112.512,57.856 112.512,62.464 115.069,65.021 124.291,65.021 128,61.312 140.8,61.312 ; C22.2 C22.2@122.933,65.205 ; C23.2 122.939,73.555 ; 132.08,74.371 133.099,73.352 C19.2 ; C24.2 C20.2 142.464,57.121 142.464,59.648 140.416,61.696 140.416,73.088 139.133,74.371 123.755,74.371 122.939,73.555 ; 113.287,73.454 114.103,74.27 122.225,74.27 122.939,73.555
  other v1: 107.732,2.032 113.929,2.032 38.4,9.472 40.447,11.379 31.735,11.684 33.122,12.548 41.216,18.816 52.736,20.096 34.048,25.984 118.171,50.56 114.3,51.816 54.671,57.6 21.376,60.544 62.208,64.008 26.112,66.176
  other v4: 5,5 148,5 148,65.272 5,75
GND_PUISS: C1.2 C2.2 C3.2 C4.2 C5.2 C7.2 C8.2 C9.2 C10.2 C11.2 D2.2 PUISS.1 U1.1 U1.9 U1.10 U1.11 U1.12 U1.18 U2.1 U2.9 U2.10 U2.11 U2.12 U2.18 U5.1 U5.9 U5.10 U5.11 U5.12 U5.18 | length 258.9
  Top Layer w0.5: C11.2@47.57,29.642 47.715,29.787 48.069,29.787 49.464,31.181 52.821,31.181 53.403,30.6 ; U5.1@65.849,28.424 U5.1@66.066,28.641 ; C10.2 70.887,51.994 72.105,53.213 U2.18 ; C9.2@80.074,31.158 80.58,31.664 U1.18@84.794,31.664 ; C8.2@104.028,65.036 105.159,63.905 D2.2
  Top Layer w0.8: U5.12@51.596,38.801 51.596,42.966 53.251,44.62 64.828,44.62 C7.2 67.065,39.232 ; 51.596,39.337 52.692,39.337 53.403,38.626 53.403,26.688 54.521,25.57 63.919,25.57 66.066,27.718 U5.1@66.066,28.641 ; U5.9@66.066,38.801 66.634,38.801 67.065,39.232 ; U5.10@66.066,40.071 66.226,40.071 67.065,39.232 ; 67.062,39.236 C7.2@70.212,39.236 ; U2.11@75.371,61.892 75.569,61.892 U2.11 75.625,62.103 77.228,60.5 77.228,47.973 78.295,46.906 ; U2.11@75.371,62.103 75.371,64.619 76.928,66.176 88.148,66.176 90.112,64.212 90.112,62.03 90.702,61.44 ; U2.18 76.579,53.213 77.228,52.564 ; U2.12@75.671,60.935 76.665,60.935 77.228,60.372 ; v3(78.244,42.538) 78.244,46.856 78.295,46.906 ; v3(81.699,42.538) 83.09,43.928 102.604,43.928 C1.2 102.324,41.979 100.689,41.979 99.264,40.554 U1.9@99.264,39.284 ; U1.12@84.794,39.286 84.794,42.839 85.884,43.928 ; 84.845,40.048 85.56,40.048 86.728,38.88 86.728,25.875 87.134,25.469 97.193,25.469 99.264,27.54 U1.1@99.264,29.124 ; U1.18@84.95,31.514 86.169,31.514 86.728,30.955 ; U2.1@89.841,50.673 89.841,49.359 87.388,46.906 78.295,46.906 ; U2.9@90.039,60.983 U2.9 90.114,60.908 90.646,61.44 92.565,61.44 93.132,60.873 C2.2
  Bottom Layer w0.8: C7.2 74.939,39.232 v3(78.244,42.538) v3(81.699,42.538) ; C2.2 C5.2 ; C1.2 C4.2
  Bottom Layer w1: PUISS.1 94.512,68.56 98.036,65.036 C8.2@104.028,65.036 ; 98.56,65.036 98.867,64.729 C5.2
GPD2_0: C18.1 R1.2 UNIOC_uC1.28 | length 22
  Top Layer w0.5: C18.1@116.096,60.16 117.086,61.15 R1.2 R1.2@117.225,64.386
  Bottom Layer w0.5: C18.1 116.502,60.288 117.888,60.288 121.568,56.608 121.568,50.176 123.728,48.016 UNIOC_uC1.28@124.469,48.016
GPD2_1: C20.1 R2.2 UNIOC_uC1.29 | length 22.3
  Top Layer w0.5: R2.2 137.842,64.27 139.52,62.592 C20.1@139.52,59.776
  Bottom Layer w0.5: UNIOC_uC1.29@127.009,50.556 127.996,50.556 131.2,53.76 131.2,54.784 133.12,56.704 136.967,56.704 C20.1
GPD2_2: C22.1 R3.2 UNIOC_uC1.30 | length 21.4
  Top Layer w0.5: R3.2@117.594,67.494 R3.2 118.283,67.573 121.088,64.768 121.088,61.786 C22.1
  Bottom Layer w0.5: C22.1 122.933,59.701 122.368,59.136 122.368,51.584 123.396,50.556 UNIOC_uC1.30@124.469,50.556
GPD2_3: C24.1 R4.2 UNIOC_uC1.31 | length 16
  Top Layer w0.5: R4.2 133.105,60.957 C24.1
  Bottom Layer w0.5: UNIOC_uC1.31@127.009,53.096 128.616,53.096 129.536,54.016 129.536,55.424 133.551,59.439 C24.1
MISO: J2.4 UNIOC_F1.16 | length 56
  Top Layer w0.4: v2(117.248,15.232) 117.248,15.104 120.142,12.21 J2.4
  Bottom Layer w0.5: UNIOC_F1.16@76.393,7.539 76.393,8.809 77.312,9.728 83.861,9.728 85.653,11.52 94.633,11.52 101.225,18.112 108.48,18.112 113.28,13.312 116.48,13.312 117.248,14.08 v2(117.248,15.232)
MOSI: J2.10 UNIOC_F1.22 | length 37.2
  Top Layer w0.5: v2(108.672,15.232) 112.522,11.382 J2.10
  Bottom Layer w0.5: UNIOC_F1.22@84.013,7.539 84.013,8.749 85.92,10.656 94.901,10.656 101.557,17.312 106.592,17.312 v2(108.672,15.232)
MOT0_A: MOT.5 U1.6 U1.7 | length 54
  Top Layer w0.8: MOT.5 89.448,72.62 95.38,66.688 98.048,66.688 102.666,62.07 102.666,52.086 105.88,48.872 105.88,41.826 104.864,40.81 102.781,40.81 101.054,39.083 101.054,36.797 100.393,36.137 99.871,36.137 ; U1.6@99.264,35.474 99.264,35.529 99.871,36.137 ; U1.7@99.264,36.744 99.871,36.137
MOT0_B: MOT.6 U1.14 U1.15 | length 64.7
  Top Layer w0.8: U1.14@84.638,36.744 84.794,36.744 84.224,36.174 ; U1.15@84.794,35.474 84.59,35.474 84.224,35.84 84.224,36.174 ; MOT.6 90.892,69.62 94.924,65.588 97.592,65.588 101.566,61.615 101.566,52.542 99.63,50.606 94.08,45.056 81.664,45.056 79.872,43.264 79.872,39.936 83.634,36.174 84.224,36.174
MOT1_A: MOT.4 U2.6 U2.7 | length 27.1
  Top Layer w0.8: MOT.4 83.044,69.02 84.736,67.328 90.496,67.328 95.616,62.208 95.616,59.553 94.043,57.981 91.773,57.981 ; U2.6 90.815,57.023 91.773,57.981 ; U2.7 91.46,58.293 91.773,57.981
MOT1_B: MOT.2 U2.14 U2.15 | length 22
  Top Layer w0.8: U2.15 74.561,57.023 74.112,57.472 ; U2.14 74.933,58.293 74.112,57.472 ; MOT.2 79.8,69.376 78.464,69.376 70.878,61.79 70.878,59.81 73.216,57.472 74.112,57.472
MOT2_A: MOT.1 U5.6 U5.7 | length 52.5
  Top Layer w0.8: U5.6@66.066,34.991 66.076,34.991 66.611,35.527 66.611,35.716 ; U5.7@66.066,36.261 66.611,35.716 ; MOT.1@80.256,72.704 79.892,72.704 65.536,58.348 65.536,47.626 72.352,40.81 72.352,37.61 71.336,36.594 67.881,36.594 67.004,35.716 66.611,35.716
MOT2_B: MOT.3 U5.14 U5.15 | length 62.7
  Top Layer w0.8: 50.586,36.261 51.596,36.261 51.117,35.782 51.117,35.68 50.908,35.68 ; U5.15@51.596,35.2 51.596,34.991 47.46,39.128 47.46,41.828 77.44,71.808 77.44,73.856 78.336,74.752 81.92,74.752 83.044,73.628 MOT.3
NCS_1: J2.6 UNIOC_F1.12 | length 58.8
  Top Layer w0.5: v2(114.432,15.104) 117.602,11.934 J2.6
  Bottom Layer w0.5: UNIOC_F1.12@71.313,7.539 71.313,8.465 72.448,9.6 73.621,9.6 75.445,11.424 83.294,11.424 85.086,13.216 94.067,13.216 100.563,19.712 112.64,19.712 114.432,17.92 v2(114.432,15.104)
NCS_2: J2.2 UNIOC_F1.14 | length 59.5
  Top Layer w0.5: v2(111.758,17.394) 117.774,17.394 121.472,13.696 121.472,12.032 122.682,10.822 J2.2
  Bottom Layer w0.5: UNIOC_F1.14@73.853,7.539 73.853,8.701 75.776,10.624 83.625,10.624 85.417,12.416 94.398,12.416 100.894,18.912 110.24,18.912 v2(111.758,17.394)
NCS_3: J2.14 UNIOC_F1.26 | length 24.2
  Top Layer w0.3: J2.14 J2.14@107.442,10.062
  Top Layer w0.5: v2(102.528,14.976) 103.04,14.976 107.442,10.574 J2.14
  Bottom Layer w0.5: UNIOC_F1.26@89.093,7.539 95.091,7.539 102.272,14.72 102.272,14.976 v2(102.528,14.976)
NetC9_1: C9.1 U1.17 | length 4.9
  Top Layer w0.5: C9.1 80.601,32.934 U1.17@84.794,32.934
NetC10_1: C10.1 U2.17 | length 5.7
  Top Layer w0.5: C10.1 69.922,54.306 70.099,54.483 U2.17
NetC11_1: C11.1 U5.17 | length 4.2
  Top Layer w0.5: C11.1@47.57,31.928 47.613,31.971 48.069,31.971 48.55,32.451 U5.17@51.596,32.451
NetD2_1: D2.1 R32.1 | length 4.7
  Top Layer w0.5: D2.1 109.491,58.2 R32.1
NetJ5_1: J5.1 R1.1 | length 22.1
  Top Layer w0.5: J5.1 104.172,75.826 101.956,73.609 101.956,71.069 103.327,69.698 108.814,69.698 113.986,64.525 R1.1
NetJ6_1: J6.1 R2.1 | length 14.8
  Top Layer w0.5: J6.1 130.08,74.592 131.584,73.088 131.584,70.144 132.992,68.736 134.016,68.736 136.196,66.556 R2.1
NetJ7_1: J7.1 R3.1 | length 12.8
  Top Layer w0.5: J7.1 111.201,75.101 111.201,69.494 113.122,67.573 R3.1
NetJ8_1: J8.1 R4.1 | length 20.6
  Top Layer w0.5: J8.1@121.209,76.708 J8.1 120.752,76.016 120.752,71.04 122.672,69.12 130.033,69.12 R4.1
NetR7_1: R7.1 U1.13 U2.13 U5.13 | length 88.7
  Top Layer w0.5: v2(49.152,40.591) 49.152,39.016 50.637,37.531 U5.13@51.596,37.531 ; v2(72.961,60.673) 74.071,59.563 U2.13 ; v2(82.715,40.302) 82.715,39.337 84.038,38.014 U1.13@84.794,38.014
  Bottom Layer w0.5: v2@49.152,40.628 56.14,47.616 74.112,47.616 75.904,45.824 97.939,45.824 99.782,47.667 R7.1 ; 71.437,47.616 71.437,59.149 v2(72.961,60.673) ; v2(82.715,40.302) 84.352,41.939 84.352,43.776 85.18,44.604 86.4,45.824
NetR8_2: R8.2 U1.3 | length 2.6
  Top Layer w0.5: U1.3@99.264,31.664 101.902,31.664 R8.2
NetR9_2: R9.2 U1.19 | length 4.3
  Top Layer w0.5: R9.2 81.868,28.533 83.729,30.394 U1.19@84.794,30.394
NetR10_2: R10.2 U2.3 | length 4.6
  Top Layer w0.5: U2.3 92.067,53.213 93.557,51.723 R10.2
NetR11_2: R11.2 U2.19 | length 6.1
  Top Layer w0.5: R11.2 71.936,50.176 73.703,51.943 U2.19
NetR12_2: R12.2 U5.3 | length 4.6
  Top Layer w0.5: U5.3@66.066,31.181 67.452,31.181 68.348,30.286 R12.2
NetR13_2: R13.2 U5.19 | length 5.5
  Top Layer w0.5: R13.2 49.441,26.435 49.441,28.872 50.48,29.911 U5.19@51.596,29.911
PWM0_3V3: U4.6 UNIOC_F1.5 | length 29
  Bottom Layer w0.3: 60.8,17.963 U4.6
  Bottom Layer w0.5: 60.8,17.963 59.691,17.963 56.576,14.848 56.576,4.224 57.6,3.2 63.104,3.2 63.693,3.789 UNIOC_F1.5@63.693,4.999
PWM0_5V: R9.1 U4.18 | length 15.9
  Top Layer w0.5: R9.1 81.868,21.812 v2(81.92,21.76)
  Bottom Layer w0.3: U4.18 80.821,18.613 81.92,19.712 81.92,20.224
  Bottom Layer w0.5: 81.92,20.224 v2(81.92,21.76)
PWM1_3V3: U4.7 UNIOC_F1.7 | length 35.6
  Bottom Layer w0.3: 61.518,18.613 U4.7
  Bottom Layer w0.5: 61.518,18.663 60.981,19.2 59.52,19.2 55.424,15.104 55.424,3.968 56.992,2.4 64.864,2.4 66.233,3.769 UNIOC_F1.7@66.233,4.999
PWM1_5V: R11.1 U4.17 | length 48.8
  Top Layer w0.5: R11.1 72.52,46.136 v2(74.24,44.416)
  Bottom Layer w0.3: U4.17 79.167,19.263 79.602,19.698
  Bottom Layer w0.5: v2(74.24,44.416) 71.04,44.416 67.712,41.088 67.712,38.528 69.632,36.608 75.904,36.608 77.824,34.688 77.824,26.859 80.256,24.427 80.256,20.352 79.602,19.698
PWM2_3V3: U4.9 UNIOC_F1.11 | length 47.9
  Bottom Layer w0.3: 62.409,20.864 63.36,19.913 U4.9
  Bottom Layer w0.5: 62.409,20.864 62.153,21.12 58.368,21.12 55.846,18.598 53.12,15.872 53.12,3.968 56.32,0.768 67.84,0.768 71.313,4.241 UNIOC_F1.11@71.313,4.999
PWM2_5V: R13.1 U4.15 | length 34.5
  Top Layer w0.5: R13.1 49.076,22.86 49.792,22.144 76.8,22.144 v2(77.056,21.888)
  Bottom Layer w0.3: U4.15 75.731,20.563 76.036,20.868
  Bottom Layer w0.5: 76.036,20.868 v2(77.056,21.888)
PWM_SENSOR: J1.3 J1.9 J1.15 J1.21 J1.27 J1.33 UNIOC_F2.12 | length 143.1
  Top Layer w0.5: v2(6.016,24.064) 6.082,24.13 J1.9 ; v2(6.144,40.192) 6.966,39.37 J1.21 ; v2(6.144,46.976) 6.158,46.99 J1.27 ; v2@6.146,16.51 J1.3 ; v2@6.15,31.75 J1.15 ; J1.33 9.006,54.61 8.128,55.488 8.128,63.296 v2(13.568,68.736)
  Bottom Layer w0.5: v2(6.016,24.064) 6.016,24.448 v2@6.144,24.576 ; v2(6.144,16.512) 6.144,61.312 v2(13.568,68.736) 15.232,68.736 30.848,53.12 30.848,43.776 39.391,35.233 UNIOC_F2.12@41.461,35.233
  other v2: 6.144,31.744
RESET_ADNS: J2.12 UNIOC_F1.24 | length 30.9
  Top Layer w0.5: v2(105.728,15.104) 109.982,10.85 J2.12
  Bottom Layer w0.5: UNIOC_F1.24@86.553,7.539 86.553,8.345 88.064,9.856 95.232,9.856 101.888,16.512 104.32,16.512 v2(105.728,15.104)
SCLK: J2.8 UNIOC_F1.19 | length 47.4
  Top Layer w0.5: v2(92.8,5.888) 92.8,8.192 101.632,17.024 109.568,17.024 115.062,11.53 J2.8
  Bottom Layer w0.5: UNIOC_F1.19@81.473,4.999 81.473,3.263 82.048,2.688 90.624,2.688 92.8,4.864 v2(92.8,5.888)
SIGNAL_SENSOR_0: J1.1 UNIOC_F2.5 | length 55.3
  Top Layer w0.5: J1.1 10.414,10.066 11.136,9.344 v2(17.792,9.344)
  Bottom Layer w0.5: v2(17.792,9.344) 23.808,9.344 29.952,15.488 43.264,15.488 46.72,18.944 46.72,26.624 45.731,27.613 UNIOC_F2.5@44.001,27.613
SIGNAL_SENSOR_1: J1.7 UNIOC_F2.7 | length 77.3
  Top Layer w0.5: J1.7 6.486,21.59 4.608,19.712 4.608,13.824 11.648,6.784 v2(18.176,6.784)
  Bottom Layer w0.5: v2(18.176,6.784) 22.528,6.784 30.432,14.688 43.616,14.688 47.616,18.688 47.616,28.288 45.751,30.153 UNIOC_F2.7@44.001,30.153
SIGNAL_SENSOR_2: J1.13 UNIOC_F2.9 | length 93.9
  Top Layer w0.5: J1.13 5.658,29.21 2.816,26.368 2.816,14.208 12.288,4.736 v2(20.608,4.736)
  Bottom Layer w0.5: v2(20.608,4.736) 21.632,4.736 30.784,13.888 44.096,13.888 48.64,18.432 48.64,30.464 46.411,32.693 UNIOC_F2.9@44.001,32.693
SIGNAL_SENSOR_3: J1.19 UNIOC_F2.18 | length 92.5
  Top Layer w0.5: J1.19 6.306,36.83 3.456,39.68 3.456,66.432 10.112,73.088 v2(13.184,73.088)
  Bottom Layer w0.5: v2(13.184,73.088) 14.592,73.088 15.839,71.841 33.536,54.144 33.536,46.848 37.531,42.853 UNIOC_F2.18@41.461,42.853
SIGNAL_SENSOR_4: J1.25 UNIOC_F2.16 | length 82.8
  Top Layer w0.5: J1.25 5.982,44.45 4.48,45.952 4.48,65.664 10.241,71.425 v2(10.752,71.425)
  Bottom Layer w0.5: v2(10.752,71.425) 15.124,71.425 16.224,70.325 32.736,53.813 32.736,46.496 38.919,40.313 UNIOC_F2.16@41.461,40.313
SIGNAL_SENSOR_5: J1.31 UNIOC_F2.14 | length 70.4
  Top Layer w0.5: J1.31 8.858,52.07 7.328,53.6 7.328,65.696 v2(10.496,68.864)
  Bottom Layer w0.5: v2(10.496,68.864) 11.904,70.272 15.145,70.272 15.88,69.538 31.936,53.481 31.936,44.864 39.027,37.773 UNIOC_F2.14@41.461,37.773
pads on no net: ALIM_5v.1 ALIM_5v.3 cod0.4 cod1.4 cod2.4 Compas.1 Compas.4 J1.37 J1.38 J1.39 J1.40 MOT. PUISS.3 U1.2 U1.8 U1.20 U2.2 U2.8 U2.20 U3.14 U4.14 U5.2 U5.8 U5.20 UNIOC_F1.1 UNIOC_F1.2 UNIOC_F1.3 UNIOC_F1.4 UNIOC_F1.6 UNIOC_F1.13 UNIOC_F1.15 UNIOC_F1.17 UNIOC_F1.18 UNIOC_F1.20 UNIOC_F1.21 UNIOC_F1.23 UNIOC_F1.25 UNIOC_F2.1 UNIOC_F2.11 UNIOC_F2.13 UNIOC_F2.15 UNIOC_F2.17 UNIOC_F2.26 UNIOC_uC1.1 UNIOC_uC1.2 UNIOC_uC1.3 UNIOC_uC1.4 UNIOC_uC1.5 UNIOC_uC1.6 UNIOC_uC1.7 UNIOC_uC1.8 UNIOC_uC1.9 UNIOC_uC1.10 UNIOC_uC1.11 UNIOC_uC1.12 UNIOC_uC1.13 UNIOC_uC1.14 UNIOC_uC1.15 UNIOC_uC1.17 UNIOC_uC1.18 UNIOC_uC1.19 UNIOC_uC1.20 UNIOC_uC1.21 UNIOC_uC1.22 UNIOC_uC1.23 UNIOC_uC1.24 UNIOC_uC1.25 UNIOC_uC1.26 UNIOC_uC1.27 UNIOC_uC1.34
copper on no net:
  other v1: 56.111,27.227 57.411,27.227 58.711,27.227 60.011,27.227 61.311,27.227 89.309,27.709 90.609,27.709 91.909,27.709 93.209,27.709 94.509,27.709 56.111,28.527 57.411,28.527 58.711,28.527 60.011,28.527 61.311,28.527 89.309,29.009 90.609,29.009 91.909,29.009 93.209,29.009 94.509,29.009 56.111,29.827 57.411,29.827 58.711,29.827 60.011,29.827 61.311,29.827 89.309,30.309 90.609,30.309 91.909,30.309 93.209,30.309 94.509,30.309 56.111,31.127 57.411,31.127 58.711,31.127 60.011,31.127 61.311,31.127 89.309,31.609 90.609,31.609 91.909,31.609 93.209,31.609 94.509,31.609 56.111,32.427 57.411,32.427 58.711,32.427 60.011,32.427 61.311,32.427 89.309,32.909 90.609,32.909 91.909,32.909 93.209,32.909 94.509,32.909 56.111,33.727 57.411,33.727 58.711,33.727 60.011,33.727 61.311,33.727 89.309,34.209 90.609,34.209 91.909,34.209 93.209,34.209 94.509,34.209 56.111,35.027 57.411,35.027 58.711,35.027 60.011,35.027 61.311,35.027 89.309,35.509 90.609,35.509 91.909,35.509 93.209,35.509 94.509,35.509 56.111,36.327 57.411,36.327 58.711,36.327 60.011,36.327 61.311,36.327 89.309,36.809 90.609,36.809 91.909,36.809 93.209,36.809 94.509,36.809 56.111,37.627 57.411,37.627 58.711,37.627 60.011,37.627 61.311,37.627 89.309,38.109 90.609,38.109 91.909,38.109 93.209,38.109 94.509,38.109 56.111,38.927 57.411,38.927 58.711,38.927 60.011,38.927 61.311,38.927 89.309,39.409 90.609,39.409 91.909,39.409 93.209,39.409 94.509,39.409 56.111,40.227 57.411,40.227 58.711,40.227 60.011,40.227 61.311,40.227 89.309,40.709 90.609,40.709 91.909,40.709 93.209,40.709 94.509,40.709 56.111,41.527 57.411,41.527 58.711,41.527 60.011,41.527 61.311,41.527 89.309,42.009 90.609,42.009 91.909,42.009 93.209,42.009 94.509,42.009 80.076,49.256 81.376,49.256 82.676,49.256 83.976,49.256 85.276,49.256 80.076,50.556 81.376,50.556 82.676,50.556 83.976,50.556 85.276,50.556 80.076,51.856 81.376,51.856 82.676,51.856 83.976,51.856 85.276,51.856 80.076,53.156 81.376,53.156 82.676,53.156 83.976,53.156 85.276,53.156 80.076,54.456 81.376,54.456 82.676,54.456 83.976,54.456 85.276,54.456 80.076,55.756 81.376,55.756 82.676,55.756 83.976,55.756 85.276,55.756 80.076,57.056 81.376,57.056 82.676,57.056 83.976,57.056 85.276,57.056 80.076,58.356 81.376,58.356 82.676,58.356 83.976,58.356 85.276,58.356 80.076,59.656 81.376,59.656 82.676,59.656 83.976,59.656 85.276,59.656 80.076,60.956 81.376,60.956 82.676,60.956 83.976,60.956 85.276,60.956 80.076,62.256 81.376,62.256 82.676,62.256 83.976,62.256 85.276,62.256 80.076,63.556 81.376,63.556 82.676,63.556 83.976,63.556 85.276,63.556

## Polygon pours and split planes (outlines as drawn)
GND on Top Layer (hatched 90Degree grid 0.508 track 0.6, remove dead copper): 0,80 0,0 153.088,0 153.088,80 100.608,80 100.608,67.2 108.032,67.2 113.28,61.952 113.28,34.304 101.12,22.144 40.192,22.144 40.192,53.76 55.04,53.76 75.136,73.856 75.136,80
GND on Bottom Layer (hatched 90Degree grid 0.508 track 0.6, remove dead copper): 0,80 0,0 153.088,0 153.088,80 100.608,80 100.608,67.2 108.032,67.2 113.28,61.952 113.28,34.304 101.12,22.144 40.192,22.144 40.192,53.76 55.04,53.76 75.136,73.856 75.136,80

## Keep-outs
Keep-Out Layer:
  lines w0.2: 0,0 153,0 153,80 0,80 0,0

## Other copper
Top Layer:
  text "TOP" at 9.228,77.711 h1.52
  text "Rob'Otter" at 135.424,13.312 h1.52
  text "PROP MMX V1" at 134.528,10.24 h1.52
Bottom Layer:
  text "BOT" at 9.228,77.711 h1.52
Multi-Layer:
  text "+ Un texte pour les aligner tous" at 22.591,-4.267 h1.52

## Silkscreen, mask and mechanical layers (free items; w line width, h text height)
Top Overlay:
  rectangle: 51.296,10.168 52.296,11.668
  rectangle: 46.296,10.168 47.296,11.668
  rectangle: 41.296,10.168 42.296,11.668
  rectangle: 149.677,21.668 150.677,23.168
  rectangle: 145.161,21.668 146.161,23.168
  rectangle: 140.709,21.668 141.709,23.168
  rectangle: 136.209,21.668 137.209,23.168
  rectangle: 149.492,31.288 150.492,32.788
  rectangle: 144.976,31.288 145.976,32.788
  rectangle: 140.524,31.288 141.524,32.788
  rectangle: 136.024,31.288 137.024,32.788
  rectangle: 131.024,31.288 132.024,32.788
  rectangle: 145.504,42.424 146.504,43.924
  rectangle: 140.504,42.424 141.504,43.924
  rectangle: 135.504,42.424 136.504,43.924
  lines w0.254: 44.296,4.168 44.296,7.168 44.296,10.168 ; 49.296,4.168 49.296,7.168 49.296,10.168 ; 134.024,28.288 134.024,31.288 ; 138.504,39.424 138.504,42.424 ; 139.024,28.288 139.024,31.288 ; 139.209,18.668 139.209,21.668 ; 143.024,28.288 143.024,31.288 ; 143.209,18.668 143.209,21.668 ; 143.504,39.424 143.504,42.424 ; 147.976,28.288 147.976,31.288 ; 148.161,18.668 148.161,21.668 ; 39.296,7.168 39.296,4.168 54.296,4.168 54.296,7.168 ; 39.296,7.168 54.296,7.168 ; 39.296,7.168 39.296,10.168 54.296,10.168 54.296,7.168 ; 129.024,28.288 151.976,28.288 151.976,31.288 129.024,31.288 129.024,28.288 ; 133.504,39.424 148.504,39.424 148.504,42.424 133.504,42.424 133.504,39.424 ; 134.209,18.668 152.161,18.668 152.161,21.668 134.209,21.668 134.209,18.668
  text "-" at 93.696,68.736 h2.5
  text "+" at 96.64,68.736 h2.5
  text "GP2 top:" at 135.443,45.056 h1.52
  text "GP2" at 134.024,40.144 h1.52
  text "GND" at 139.024,40.144 h1.52
  text "5V" at 144.904,40.144 h1.52
  text "encoder top:" at 132.903,33.92 h1.52
  text "A" at 140.544,29.184 h1.52
  text "5V" at 144.64,29.184 h1.52
  text "GND" at 129.544,29.008 h1.52
  text "NC" at 135.296,28.928 h1.52
  text "B" at 149.504,28.928 h1.52
  text "alim top:" at 136.448,24.32 h1.52
  text "NC" at 140.032,19.456 h1.52
  text "GND" at 143.616,19.328 h1.52
  text "NC" at 149.12,19.328 h1.52
  text "5V" at 135.481,19.308 h1.52
  text "motor top:" at 40.064,12.928 h1.52
  text "2A" at 40.448,7.936 h1.52
  text "2B" at 45.568,7.936 h1.52
  text "0A" at 50.696,7.888 h1.52
  text "0B" at 50.696,4.888 h1.52
  text "1B" at 40.704,4.864 h1.52
  text "1A" at 45.696,4.864 h1.52

## Dimensions
0,0 to 153,0 on Mechanical 1
153,0 to 153,80 on Mechanical 1

## Text inside footprints (layer, text, board x,y; h text height)
J1: Bottom Overlay "2" at 13.284,10.668 h1.52 r270; Bottom Overlay "1" at 10.668,11.074 h1.52 r270
J2: Bottom Overlay "2" at 125.984,10.236 h1.52; Bottom Overlay "1" at 125.578,7.62 h1.52
UNIOC_F1: Top Overlay "26" at 91.006,6.914 h1.52; Top Overlay "1" at 56.081,3.739 h1.52
UNIOC_F2: Top Overlay "26" at 42.086,54.926 h1.52 r90; Top Overlay "1" at 45.261,20.001 h1.52 r90
UNIOC_uC1: Top Overlay "34" at 125.115,57.542 h1.52 r90; Top Overlay "1" at 128.29,12.457 h1.52 r90